# Altium PCB smartBattery.PcbDoc
Units mm, origin at the board's own origin, x right, y up, seen from the top; angles counter-clockwise.
Board outline 152.4 x 101.6 mm, 2 copper layers (Top Layer, Bottom Layer); 18 components, 21 nets, 57 pads, 1 vias.
Unrouted connection lines stored in the file: 4.
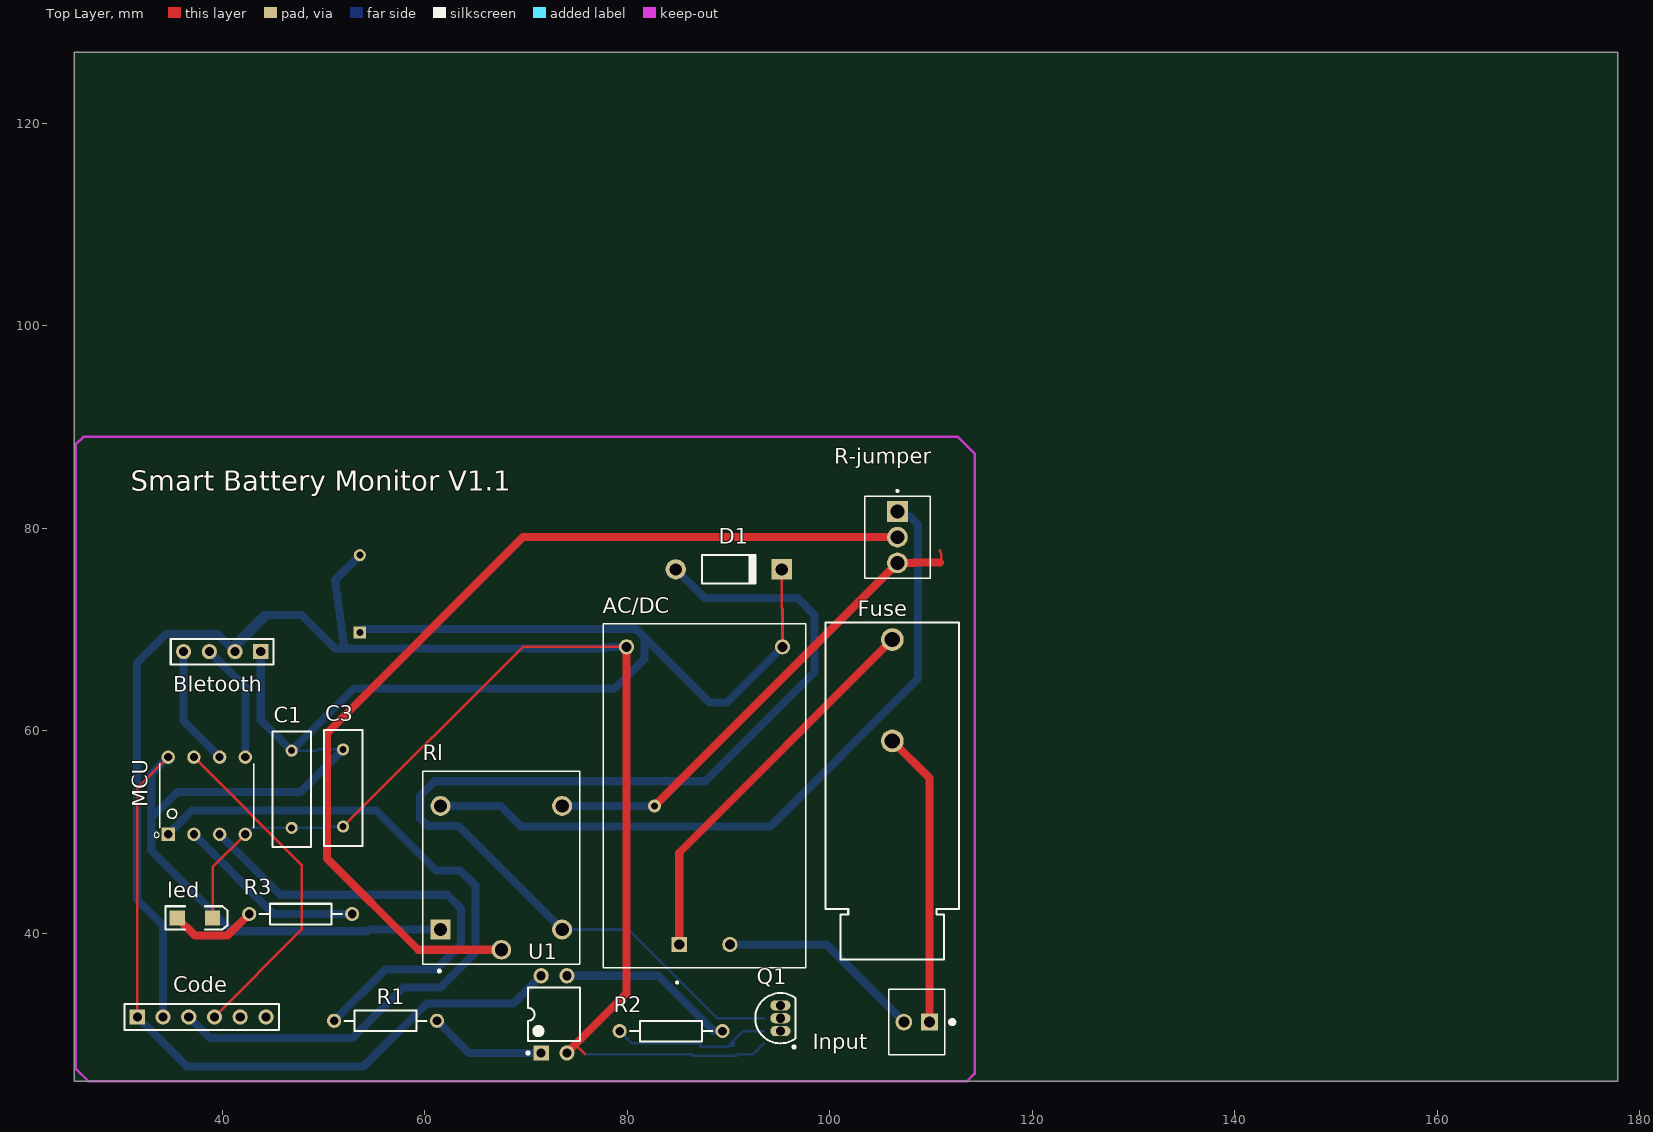
[diagram p0: Top Layer view]
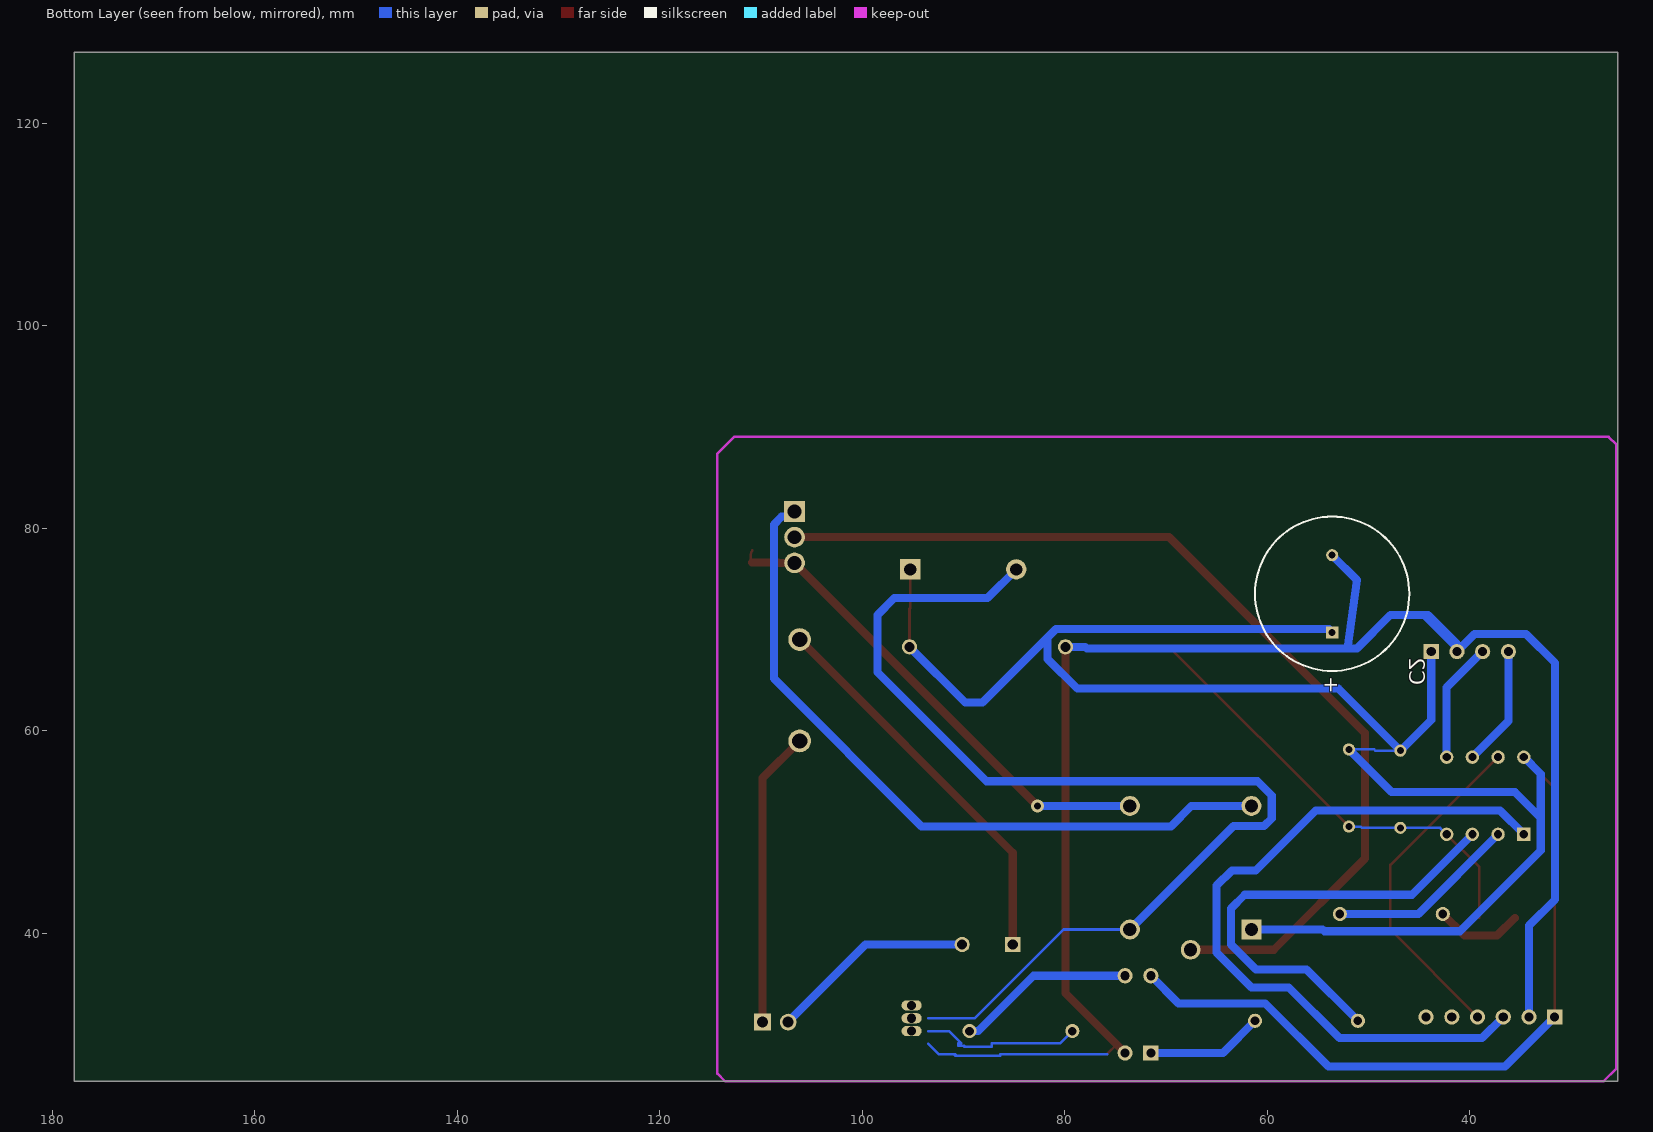
[diagram p1: Bottom Layer view, seen from below]

## Layer stack, top to bottom
Top Solder: solder mask 0.0102, Solder Resist, Dk 3.5
Top Layer: signal copper 0.0356
Dielectric 1: dielectric 0.32, FR-4, Dk 4.8
Bottom Layer: signal copper 0.0356
Bottom Solder: solder mask 0.0102, Solder Resist, Dk 3.5

## Board outline
25.4,25.4 177.8,25.4 177.8,127 25.4,127

## Design rules (kind name [scope] priority, off if disabled: settings)
Clearance [All] p1: gap=0.6 ignorepadtopadclearanceinfootprint=FALSE
PolygonConnect [All] p1: connectstyle=Relief reliefconductorwidth=0.254 reliefentries=4 polygonreliefangle="90 Angle" airgapwidth=0.254
RoutingVias [All] p1: holewidth=0.711 width=1.27 viastyle="Through Hole" minholewidth=0.711 minwidth=1.27 maxholewidth=0.711 maxwidth=1.27
SolderMaskExpansion [All] p1: expansion=0.102 istentingtop=FALSE
Width [All] p1: maxlimit=1 minlimit=0.6 preferedwidth=0.8
30 further rules are at their usual default settings.

## Components (designator, comment, footprint, x,y, rotation, side; value= is the part's Value field where it differs from the comment)
AC/DC "HLK-PM03" CONV_HLK-PM03 87.63,53.594 r90 top
Bletooth "Bluetooth Module" HDR1X4 43.815,67.818 r180 top (schematic designator P1)
C1 "Cap" RAD-0.3 46.863,54.229 r90 top value=0.1uf
C2 "Cap" RB7.6-15 53.594,73.533 r270 bottom value=10uf
C3 "Cap" RAD-0.3 51.943,54.356 r90 top value=0.1uf
Code "" HDR1X6 31.623,31.75 r0 top
D1 "Diode 1N4001" DO-41 90.02,75.946 r0 top
Fuse "Fuse" 696310001002 106.172,64.008 r90 top (schematic designator J2)
Input "AC 220" CONN_282834-2 108.585,31.242 r180 top (schematic designator J)
led "LED2" 3.2X1.6X1.1 37.31,41.529 r0 top (schematic designator D2)
MCU "ATTINY85-20PU" DIP762W46P254L927H533Q8B 38.481,53.594 r90 top
Q1 "2N3904" TO-92A 95.123,31.623 r0 top
R1 "Res2" AXIAL-0.4 56.134,31.369 r0 top value=470
R2 "Res2" AXIAL-0.4 84.328,30.353 r0 top value=470
R3 "Res2" AXIAL-0.4 47.752,41.91 r0 top value=220
R-jumper "Charger Socket" TE_282834-3 106.68,81.661 r270 top (schematic designator J1)
Rl "Relay 5VDC" RELAY_SRD-05VDC-SL-C 67.564,46.482 r90 top
U1 "PC817" DIP-4 72.771,32.004 r90 top

## Footprints (in the part's own frame and the unit in brackets; to place one, negate y for a bottom-side part, rotate by r counter-clockwise, add the part's x,y. Pads: shape width x height; smd on the part's side, far side on the other; paste and mask are expansions set on the pad)
3.2X1.6X1.1 [mm] "SMT LED; 2 Flat Leads"
  rect 1.5x1.5 smd: 1(-1.75,0) 2(1.75,0)
  silkscreen extent -2.9,-1.15 3.2,1.15
696310001002 [mm]
  round 2.25 hole 1.5: 1(-5,0) 2(5,0)
  silkscreen extent -26.6,-6.6 6.7,6.6
AXIAL-0.4 [mm] "Axial Device, Thru-Hole; 2 Leads; 0.4 in Pin Spacing"
  round 1.4 hole 0.85: 1(-5.08,0) 2(5.08,0)
  silkscreen extent -4.06,-1.02 4.06,1.02
CONN_282834-2 [mm]
  rect 1.65x1.65 hole 1.1: 1(-1.27,0)
  round 1.65 hole 1.1: 2(1.27,0)
  silkscreen extent -3.7,-3.25 2.77,3.25
CONV_HLK-PM03 [mm]
  rect 1.508x1.508 hole 1: 1(-14.7,2.5)
  round 1.508 hole 1: 2(-14.7,-2.5) 3(14.7,7.7) 4(14.7,-7.7)
  silkscreen extent -18.55,-10 17,10
DIP762W46P254L927H533Q8B [mil]
  rect 52x52 hole 32: 1(-150,150)
  round 52 hole 32: 2(-150,50) 3(-150,-50) 4(-150,-150) 5(150,-150) 6(150,-50) 7(150,50) 8(150,150)
  silkscreen extent -163,-182 125,205, body extent -155,-182 155,182, height 98
DIP-4 [mm] "DIP; 4 Leads; Row Spacing 7.62 mm; Pitch 2.54 mm"
  rect 1.5x1.5 hole 0.9: 1(-3.81,1.27)
  round 1.5 hole 0.9: 2(-3.81,-1.27) 3(3.81,-1.27) 4(3.81,1.27)
  silkscreen extent -3.93,-2.55 2.65,2.69, body extent -3.15,-2.5 3.15,2.5, height 5.6
DO-41 [mm] "Diode, Axial; Body 5.2 x 2.7 mm (LxDia. max), Lead Dia. 0.86 mm (max)"
  round 2 hole 1.2: 1(-5.23,0)
  rect 2x2 hole 1.2: 2(5.23,0)
  silkscreen extent -2.65,-1.4 2.75,1.4
HDR1X4 [mm] "Connector; Header; 4 Position"
  rect 1.5x1.5 hole 0.9: 1(0,0)
  round 1.5 hole 0.9: 2(2.54,0) 3(5.08,0) 4(7.62,0)
  silkscreen extent -1.27,-1.27 8.89,1.27
HDR1X6 [mm] "Connector; Header; 6 Position"
  rect 1.5x1.5 hole 0.9: 1(0,0)
  round 1.5 hole 0.9: 2(2.54,0) 3(5.08,0) 4(7.62,0) 5(10.16,0) 6(12.7,0)
  silkscreen extent -1.27,-1.27 13.97,1.27
RAD-0.3 [mm] "Radial Cap, Thru-Hole; 2 Leads; 0.3 in Pin Spacing"
  round 1.2 hole 0.7: 1(-3.81,0) 2(3.81,0)
  silkscreen extent -5.71,-1.91 5.71,1.91
RB7.6-15 [mm] "Polarized Capacitor (Radial); 2 Leads"
  rect 1.2x1.2 hole 0.7: 1(3.81,0)
  round 1.2 hole 0.7: 2(-3.81,0)
  silkscreen extent -7.62,-7.62 7.62,7.62
RELAY_SRD-05VDC-SL-C [mm]
  rect 1.98x1.98 hole 1.32: A1(-6.1,6)
  round 1.98 hole 1.32: A2(-6.1,-6) NC(6.1,6) NO(6.1,-6)
  round 1.935 hole 1.29: COM(-8.1,0)
  silkscreen extent -10.3,-7.75 9.55,7.75
TE_282834-3 [mm]
  rect 2.04x2.04 hole 1.36: 1(0,0)
  round 2.04 hole 1.36: 2(2.54,0) 3(5.08,0)
  silkscreen extent -2.13,-3.25 6.58,3.25, body extent -4.04,0 4.04,6.5, height 7
TO-92A [mm] "TO, Flat Index; 3 In-Line, Axial Leads; Body Dia. 4.5mm; Leads 0.51 x 0.48 mm (max)"
  oval 2x1 hole 0.9: 1(0,-1.27) 2(0,0) 3(0,1.27)
  silkscreen extent -2.48,-2.95 1.5,2.48, body extent -2.48,-2.5 1.5,2.5, height 6.86

## Part data
AC/DC: "AC DC 3W power module", Package=Package, Availability=Unavailable, MF=Hi-link, MP=HLK-PM03, Price=None, SnapEDA_Link=https://www.snapeda.com/parts/HLK-PM03/Hi-link/view-part/3215695/?ref=snap
Bletooth: library part "Header 4", "Header, 4-Pin", LatestRevisionDate=17-Jul-2002, LatestRevisionNote="Re-released for DXP Platform.", Publisher="Altium Limited"
C1 C3: "Capacitor", LatestRevisionDate=17-Jul-2002, LatestRevisionNote="Re-released for DXP Platform.", PackageDescription="Radial Cap, Thru-Hole; 2 Leads; 0.3 in Pin Spacing", PackageReference=RAD-0.3, Published=8-Jun-2000, Publisher="Altium Limited"
C2: library part "Cap Pol1", "Polarized Capacitor (Radial)", LatestRevisionDate=17-Jul-2002, LatestRevisionNote="Re-released for DXP Platform.", PackageDescription="Polarized Capacitor (Radial); 2 Leads", PackageReference=RB7.6-15, Published=8-Jun-2000, Publisher="Altium Limited"
Code: library part "Header 6", "Header, 6-Pin", LatestRevisionDate=17-Jul-2002, LatestRevisionNote="Re-released for DXP Platform.", Publisher="Altium Limited"
D1: "1 Amp General Purpose Rectifier", Code_JEDEC=DO-204-AL, ComponentLink1Description="Manufacturer Link", ComponentLink1URL=http://www.fairchildsemi.com/, ComponentLink2Description=Datasheet, ComponentLink2URL=http://www.fairchildsemi.com/ds/1N%2F1N4001.pdf, DatasheetVersion=1998, LatestRevisionDate=17-Jul-2002, LatestRevisionNote="Re-released for DXP Platform.", PackageDescription="Diode, Axial; Body 5.2 x 2.7 mm (LxDia. max), Lead Dia. 0.86 mm (max)", PackageReference=DO-41, PackageVersion=Aug-1999, Published=8-Jun-2000, Publisher="Altium Limited"
Fuse: library part 696310001002, "Fuse Holder 20A 250V 1 Circuit Cartridge Through Hole", Package=None, Availability=Warning, Check_prices=https://www.snapeda.com/parts/696310001002/Wurth%20Electronics%20Inc./view-part/1196556/?ref=eda, MF="Wurth Electronics", MP=696310001002, Price=None, Purchase-URL=https://pricing.snapeda.com/search/part/696310001002/?ref=eda, SnapEDA_Link=https://www.snapeda.com/parts/696310001002/Wurth%20Electronics%20Inc./view-part/1196556/?ref=snap
Input: library part 282834-2, "Wire-To-Board Terminal Block, 2, 150 V, 10 A, 30 Awg, 16 Awg, 1.4 Mm", Package=None, Availability=Unavailable, Centerline_Pitch="2.54 mm[.1 in]", EU_RoHS_Compliance="Compliant with Exemptions", MF="TE Connectivity", MP=282834-2, Number_of_Positions=2, Price=None, SnapEDA_Link=https://www.snapeda.com/parts/282834-2/TE%20Connectivity%20AMP%20Connectors/view-part/431057/?ref=snap, TE_purchase_URL=https://www.te.com/usa-en/product-282834-2.html?te_bu=Cor&te_type=disp&te_campaign=seda_glo_cor-seda-global-disp-prtnr-fy19-seda-model-bom-cta_sma-317_1&elqCampaignId=32493
led: "Typical RED, GREEN, YELLOW, AMBER GaAs LED", LatestRevisionDate=17-Jul-2002, LatestRevisionNote="Re-released for DXP Platform.", PackageDescription="SM LED; 2 Flat Leads", PackageReference=3.2X1.6X1.1, PackageVersion=Feb-2002, Published=8-Jun-2000, Publisher="Altium Limited"
MCU: "AVR AVRÂ® ATtiny, Functional Safety (FuSa) Microcontroller IC 8-Bit 20MHz 8KB (4K x 16) FLASH 8-PDIP", Package="DIP-8 Atmel", Availability=Good, Check_prices=https://www.snapeda.com/parts/ATTINY85-20PU/Microchip/view-part/42827/?ref=eda, MF=Microchip, MP=ATTINY85-20PU, Price=None, Purchase-URL=https://pricing.snapeda.com/search/part/ATTINY85-20PU/?ref=eda, SnapEDA_Link=https://www.snapeda.com/parts/ATTINY85-20PU/Microchip/view-part/42827/?ref=snap
Q1: "NPN General Purpose Amplifier", ComponentLink1Description="Manufacturer Link", ComponentLink1URL=http://www.fairchildsemi.com/, ComponentLink2Description=Datasheet, ComponentLink2URL=http://www.fairchildsemi.com/ds/2N%2F2N3904.pdf, DatasheetVersion=1997, LatestRevisionDate=15-Jan-2003, LatestRevisionNote="PCB Footprint 'BCY-W3/D4.7' replaced", PackageDescription="TO, Flat Index; 3 In-Line, Axial Leads; Body Dia. 4.5mm; Leads 0.51 x 0.48 mm (max)", PackageReference=TO-92A, PackageVersion=Sep-1998, Published=8-Jun-2000, Publisher="Altium Limited"
R1 R2 R3: "Resistor", LatestRevisionDate=17-Jul-2002, LatestRevisionNote="Re-released for DXP Platform.", PackageDescription="Axial Device, Thru-Hole; 2 Leads; 0.4 in Pin Spacing", PackageReference=AXIAL-0.4, Published=8-Jun-2000, Publisher="Altium Limited"
R-jumper: library part 282834-3, "3 Position Wire to Board Terminal Block Horizontal with Board 0.100 (2.54mm)", Package=None, Availability=Good, Check_prices=https://www.snapeda.com/parts/282834-3/TE%20Connectivity%20AMP%20Connectors/view-part/398089/?ref=eda, EU_RoHS_Compliance="Compliant with Exemptions", MF="TE Connectivity", MP=282834-3, Price=None, Purchase-URL=https://pricing.snapeda.com/search/part/282834-3/?ref=eda, SnapEDA_Link=https://www.snapeda.com/parts/282834-3/TE%20Connectivity%20AMP%20Connectors/view-part/398089/?ref=snap
Rl: library part SRD-05VDC-SL-C, "5V Trigger Relay Module For Arduino And Raspberry Pi 5V Trigger Relay Module For Arduino And Raspberry Pi", Package=None, Availability=Unavailable, MF="Songle Relay", MP=SRD-05VDC-SL-C, Price=None, SnapEDA_Link=https://www.snapeda.com/parts/SRD-05VDC-SL-C/Songle%20Relay/view-part/1029484/?ref=snap
U1: library part Optoisolator1, "4-Pin Phototransistor Optocoupler", DatasheetVersion=Nov-2003, LatestRevisionDate=04-Mar-2005, LatestRevisionNote="Sch pins 3 & 4 Swapped.", PackageReference=DIP-4, Published=24-Mar-1999, Publisher="Altium Limited"

## Via types
v1: diameter 1.27, hole 0.711, Top Layer to Bottom Layer, 1 vias

## Nets (pads, with @x,y where several pads share a name; then routed paths per layer and width w, separated by ;. In a path a pad name is that pad's centre, name@x,y a point inside that pad or via, vN(x,y) a via of type N, cw(c..) or ccw(c..) an arc to the next point about the centre after c; other vN are vias at no path point)
"control signal": MCU.3 R1.1 | length 46.1
  Bottom Layer w0.8: MCU.3 45.72,43.815 62.23,43.815 63.576,42.469 63.576,38.913 61.099,36.436 56.121,36.436 R1.1
GND: AC/DC.3 Bletooth.2 C1.1 C2.2 C3.1 Code.2 led.2 MCU.4 Q1.1 U1.2 | length 222.2
  Top Layer w0.254: led.2 39.06,46.553 MCU.4 ; C3.1 69.691,68.294 AC/DC.3 ; 74.867,29.019 75.819,28.067
  Top Layer w0.8: U1.2 74.867,29.019 79.93,34.083 AC/DC.3
  Bottom Layer w0.254: Bletooth.2 44.882,71.425 ; MCU.4 42.926,50.419 C1.1 50.673,50.419 50.8,50.546 C3.1 ; 75.819,28.067 86.349,28.067 86.349,27.931 90.79,27.931 90.79,28.039 90.892,28.039 90.892,28.067 92.456,28.067 93.472,29.083
  Bottom Layer w0.8: Code.2 34.163,40.767 31.572,43.358 31.572,66.7 34.442,69.571 39.522,69.571 Bletooth.2 41.275,68.58 44.12,71.425 44.882,71.425 47.854,71.425 51.156,68.123 52.07,68.123 ; C2.2 51.156,74.905 52.07,68.123 ; AC/DC.3 77.971,68.294 77.8,68.123 52.07,68.123
NetAC/DC_1: AC/DC.1 Fuse.2 | length 38.8
  Top Layer w0.8: AC/DC.1 85.13,47.966 Fuse.2
NetAC/DC_2: AC/DC.2 Input.2 | length 20.4
  Bottom Layer w0.8: AC/DC.2 99.663,38.894 Input.2
NetCode_3: Code.3 MCU.1 | length 73.7
  Bottom Layer w0.8: MCU.1 37.033,52.146 55.22,52.146 61.145,46.221 63.497,46.221 64.999,44.72 64.999,38.1 61.57,34.671 57.887,34.671 52.885,29.669 38.784,29.669 Code.3
NetCode_4: Code.4 MCU.7 | length 33.6
  Top Layer w0.254: MCU.7 47.854,46.761 47.854,40.361 Code.4
NetCode_5: Code.5
NetCode_6: Code.6
NetD1_1: D1.1 Q1.3 Rl.A2 | length 109.5
  Bottom Layer w0.254: Rl.A2 80.116,40.382 88.875,31.623 93.472,31.623
  Bottom Layer w0.8: Rl.A2 63.354,50.592 60.325,50.592 59.563,51.354 59.563,53.619 60.96,55.016 87.718,55.016 98.484,65.782 98.484,71.448 96.831,73.101 87.635,73.101 D1.1
NetD2_1: led.1 R3.1 | length 8.7
  Top Layer w0.8: led.1 37.313,39.776 40.538,39.776 R3.1
NetJ1_1: R-jumper.1 Rl.NC | length 71.8
  Bottom Layer w0.8: Rl.NC 67.509,52.582 69.52,50.571 94.132,50.571 108.712,65.151 108.712,80.391 107.95,81.153 107.188,81.153 R-jumper.1
NetJ1_2: R-jumper.2 Rl.COM | length 97.7
  Top Layer w0.8: Rl.COM 59.357,38.382 50.343,47.396 50.343,59.766 69.698,79.121 R-jumper.2
NetJ1_3: R-jumper.3 Rl.NO | length 48.5
  Top Layer w0.254: 110.871,76.624 ccw(c109.601,77.216) 110.871,77.808
  Top Layer w0.8: v1(82.681,52.582) R-jumper.3 108.255,76.581 108.306,76.632 110.871,76.632 110.871,76.625
  Bottom Layer w0.8: Rl.NO v1(82.681,52.582)
NetJ2_1: Fuse.1 Input.1 | length 29.3
  Top Layer w0.8: Fuse.1 109.855,55.325 Input.1
NetMCU_2: MCU.2 R3.2 | length 18.9
  Bottom Layer w0.8: MCU.2 45.085,41.91 R3.2
NetQ1_2: Q1.2 R2.1 | length 16.5
  Bottom Layer w0.254: R2.1 80.442,29.159 87.203,29.159 87.203,28.785 89.936,28.785 89.936,28.893 90.535,28.893 90.535,29.159 90.246,29.159 91.44,30.353 93.472,30.353
NetR1_2: R1.2 U1.1 | length 11.6
  Bottom Layer w0.8: R1.2 64.389,28.194 U1.1
NetR2_2: R2.2 U1.3 | length 17.6
  Bottom Layer w0.8: U1.3 83.083,35.814 88.544,30.353 R2.2
RX: Bletooth.4 MCU.6 | length 11.9
  Bottom Layer w0.8: Bletooth.4 36.195,60.96 MCU.6
TX: Bletooth.3 MCU.5 | length 11.9
  Bottom Layer w0.8: Bletooth.3 42.291,64.262 MCU.5
VCC: AC/DC.4 Bletooth.1 C1.2 C2.1 C3.2 Code.1 D1.2 MCU.8 Rl.A1 U1.4 | length 247.9
  Top Layer w0.254: Code.1 31.623,54.356 MCU.8 ; D1.2 95.25,72.14 95.33,72.06 AC/DC.4
  Bottom Layer w0.254: C1.2 49.327,58.039 49.454,58.166 C3.2
  Bottom Layer w0.8: Code.1 36.525,26.848 53.975,26.848 60.198,33.071 68.758,33.071 U1.4 ; MCU.8 32.995,55.728 32.995,51.384 ; Bletooth.1 43.815,61.087 C1.2 52.984,64.16 78.74,64.16 81.686,67.107 81.686,69.215 ; C3.2 47.727,53.95 35.56,53.95 32.995,51.384 ; C2.1 53.924,70.053 80.848,70.053 81.686,69.215 ; Rl.A1 54.534,40.382 54.36,40.208 40.97,40.208 32.995,48.184 32.995,51.384 ; AC/DC.4 89.825,62.789 88.113,62.789 81.686,69.215

## Keep-outs
Keep-Out Layer:
  lines w0.254: 25.527,26.67 26.797,25.4 113.538,25.4 114.3,26.162 114.3,87.376 112.649,89.027 26.289,89.027 25.527,88.265 25.527,26.67

## Silkscreen, mask and mechanical layers (free items; w line width, h text height)
Top Overlay:
  text "Smart Battery Monitor V1.1" at 30.988,83.725 h2

## Text inside footprints (layer, text, board x,y; h text height)
C2: Bottom Overlay "+" at 54.331,65.401 h1.5 r90